# Altium PCB 1RGB-LED-Board_CR12xx-TESTBOARD.PcbDoc
Units mm, origin at the board's own origin, x right, y up, seen from the top; angles counter-clockwise.
Board outline 32.2 x 44.1 mm, 2 copper layers (Top Layer, Bottom Layer), stack 1.07 mm thick; 52 components, 36 nets, 146 pads, 144 vias.
Unrouted connection lines stored in the file: 14.
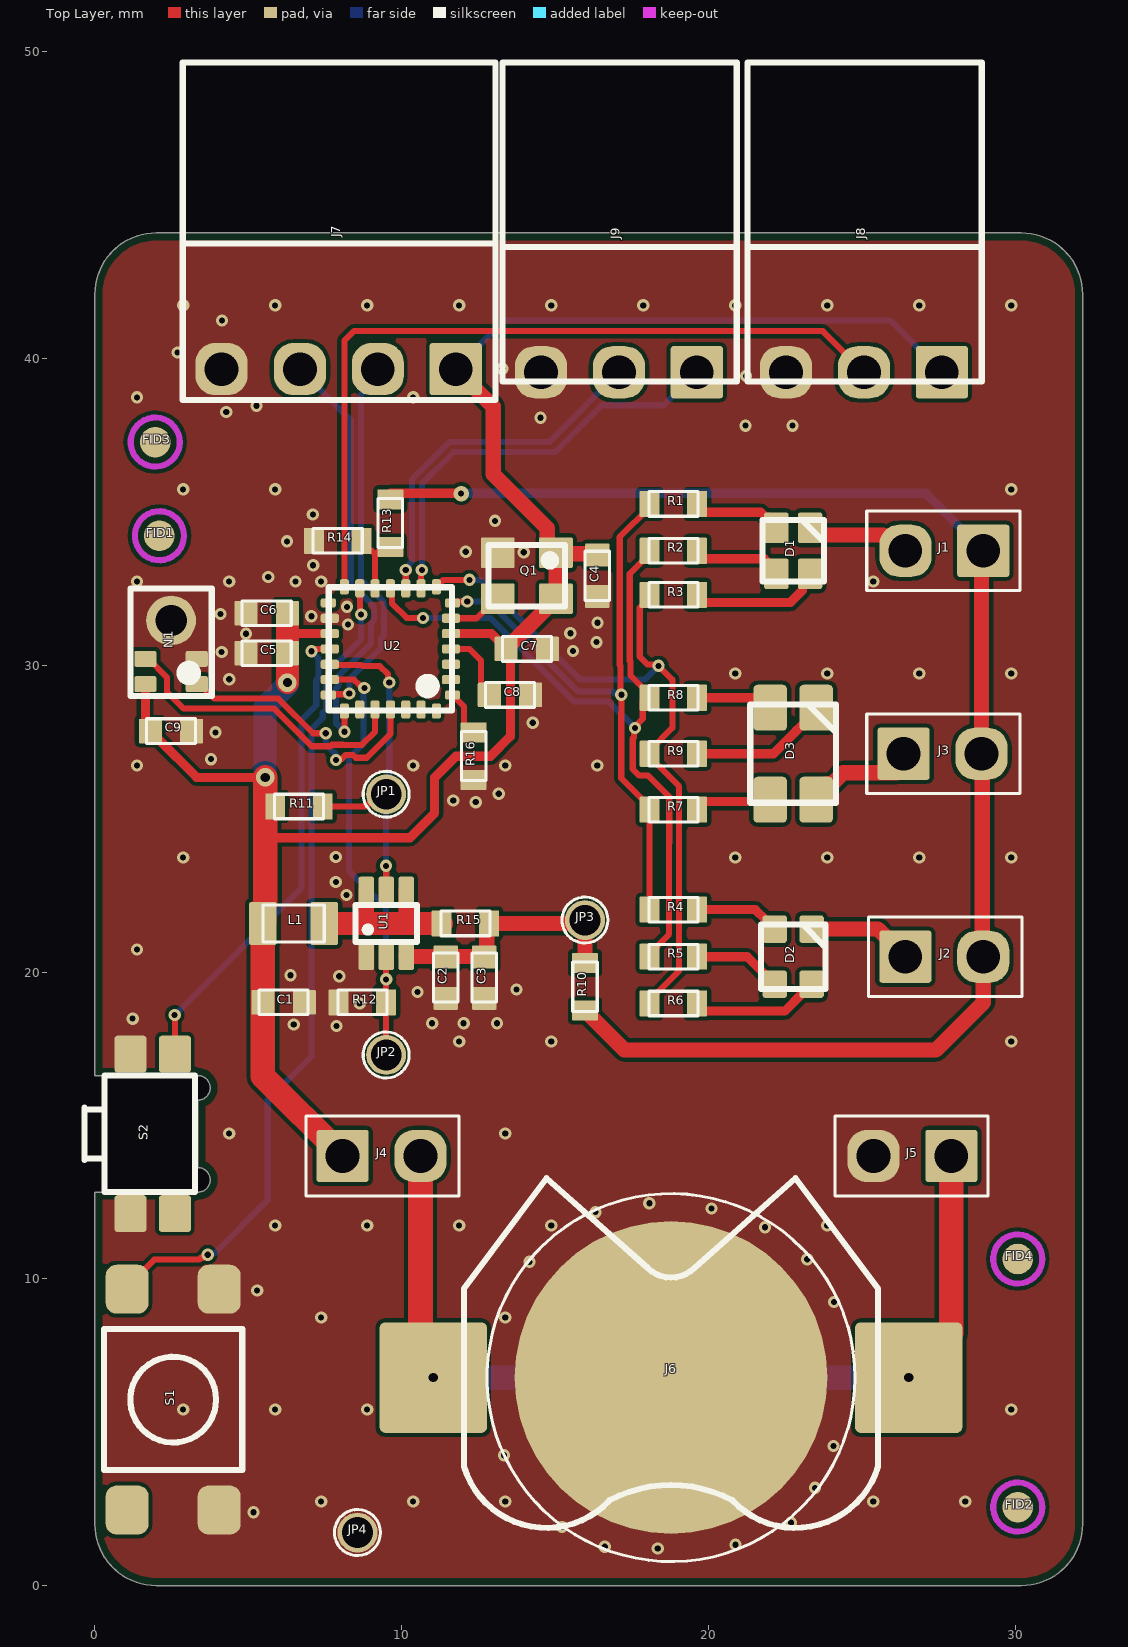
[diagram p0: Top Layer view]
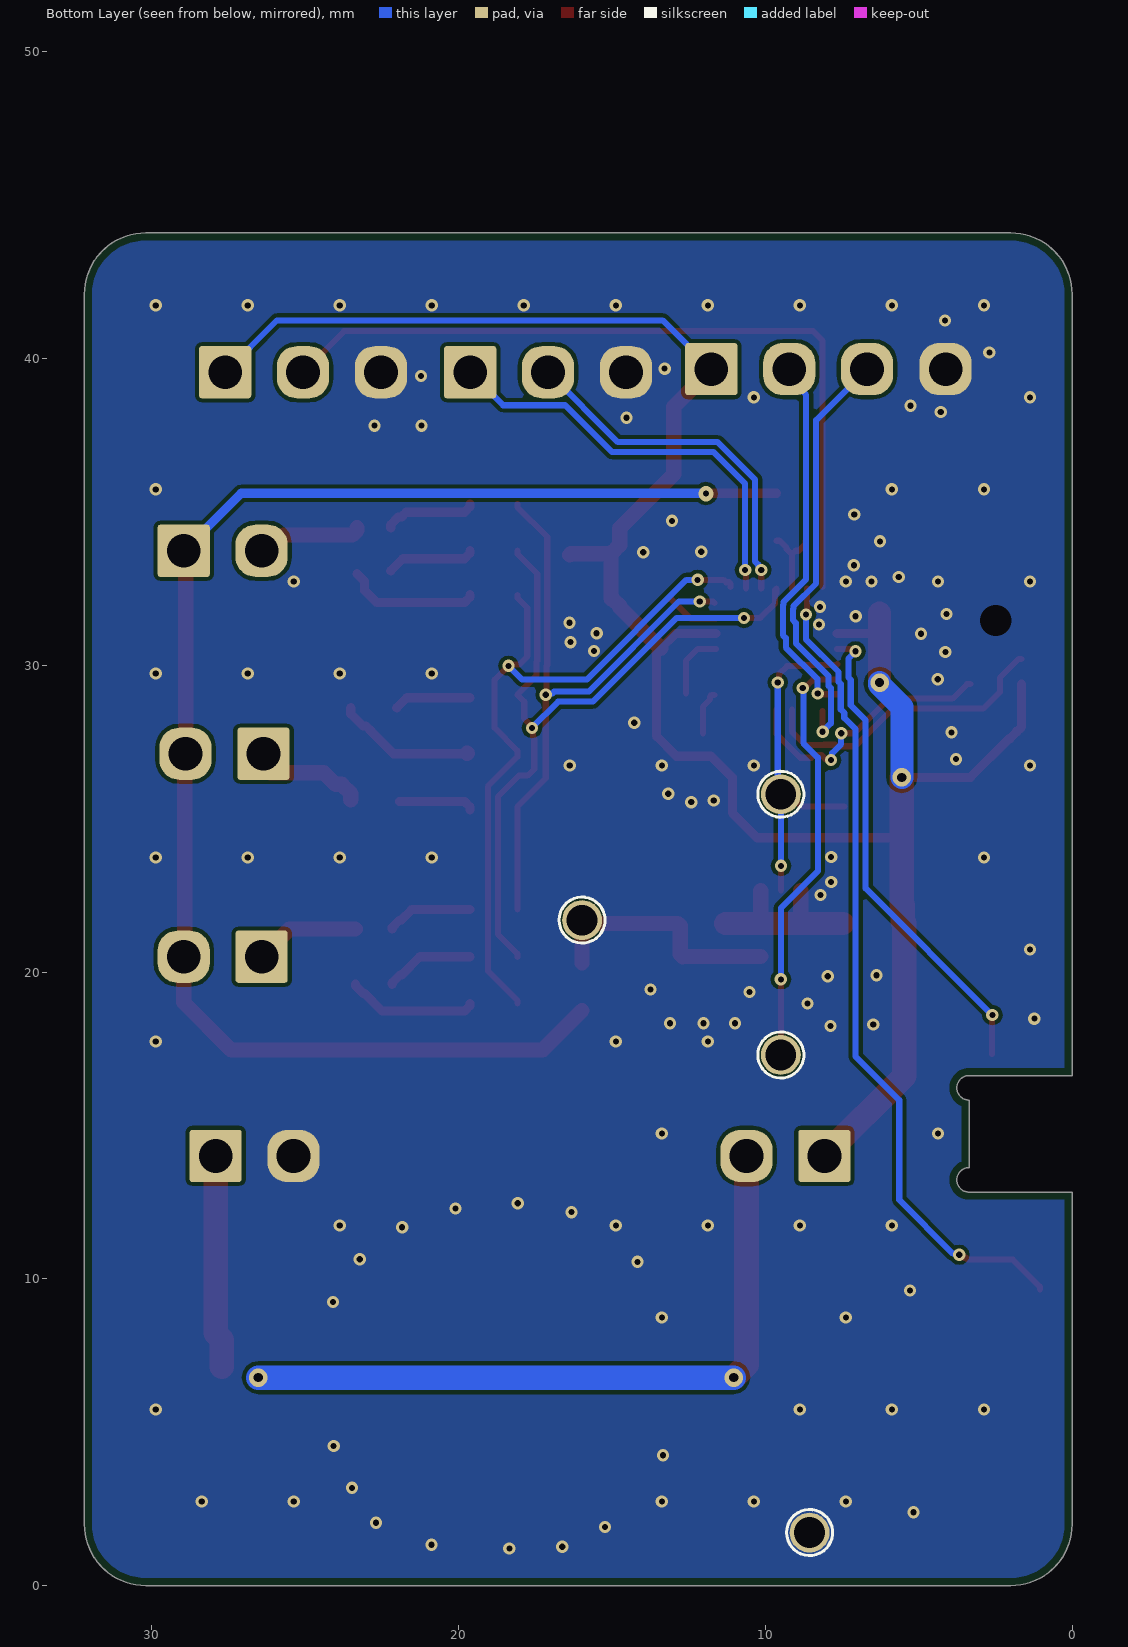
[diagram p1: Bottom Layer view, seen from below]
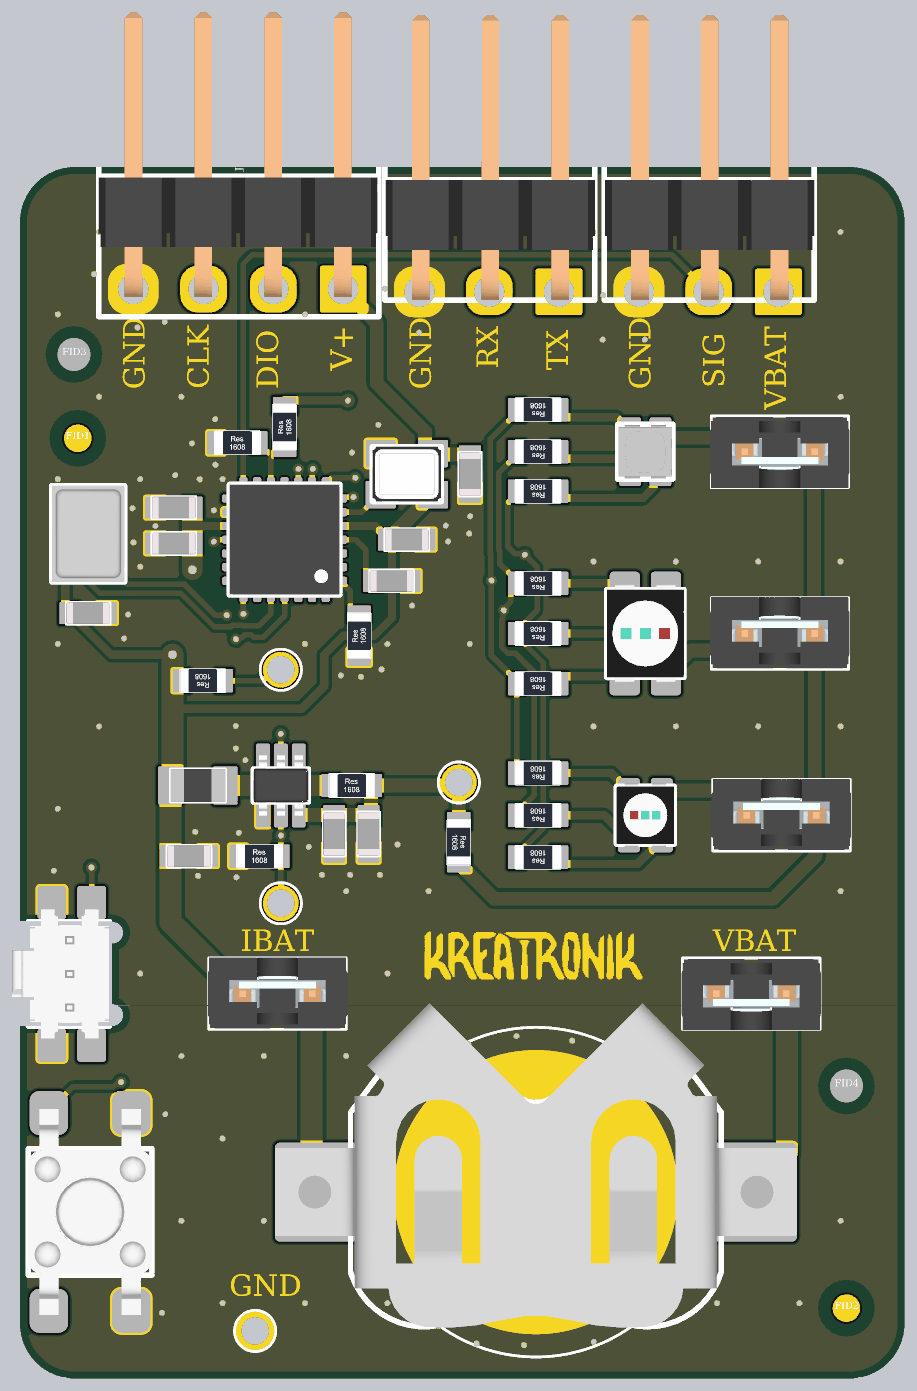
[diagram p2: 3D render of the assembled board from above, using the file's embedded part models]

## Layer stack, top to bottom
Top Solder: solder mask 0.0102, Solder Resist, Dk 3.5
Top Layer: signal copper 0.035
Dielectric1: core 1, FR-4, Dk 4.8
Bottom Layer: signal copper 0.035
Bottom Solder: solder mask 0.0102, Solder Resist, Dk 3.5

## Board outline
0,2 0,12.827 3.358,12.827 ccw(c3.358,13.227) 3.358,13.627 3.358,15.827 ccw(c3.358,16.227) 3.358,16.627 0,16.627 0,42.1 cw(c2,42.1) 2,44.1 30.2,44.1 cw(c30.2,42.1) 32.2,42.1 32.2,2 cw(c30.2,2) 30.2,0 2,0 cw(c2,2)

## Design rules (kind name [scope] priority, off if disabled: settings)
BoardOutlineClearance BoardOutlineClearance_ANT [InComponent('Y1')] p1: gap=0 ignorepadtopadclearanceinfootprint=FALSE
BoardOutlineClearance [Not(  OnLayer('Top Overlay') OR OnLayer('Bottom Overlay') OR (IsFill AND IsKeepOut) )] p2: gap=0.25 ignorepadtopadclearanceinfootprint=FALSE except(0: Arc-SplitContinuation Track-SplitContinuation SMDPad-SplitContinuation THPad-SplitContinuation Via-SplitContinuation Fill-SplitContinuation Poly-SplitContinuation Region-SplitContinuation Text-SplitContinuation)
Clearance "PCB Rand - Via" [OnLayer('Board Outline') or OnLayer('Keep-Out Layer') vs IsVia] p1: gap=0.5 ignorepadtopadclearanceinfootprint=FALSE except(0: Arc-Hole Track-Hole SMDPad-Hole THPad-Hole Via-Hole Fill-Hole Poly-Hole Region-Hole Text-Hole)
Clearance "GND-Poly zu Keepout und Rand" [InNet('GND') and InPolygon vs OnLayer('Keep-Out Layer') or OnLayer('Board Outline')] p2: gap=0.25 ignorepadtopadclearanceinfootprint=FALSE except(0: Arc-Hole Track-Hole SMDPad-Hole THPad-Hole Via-Hole Fill-Hole Poly-Hole Region-Hole Text-Hole)
Clearance "PCB Rand" [All vs OnLayer('Board Outline') or OnLayer('Keep-Out Layer')] p3: gap=0.5 ignorepadtopadclearanceinfootprint=FALSE except(0: Arc-Hole Track-Hole SMDPad-Hole THPad-Hole Via-Hole Fill-Hole Poly-Hole Region-Hole Text-Hole)
Clearance [All] p4: gap=0.125 ignorepadtopadclearanceinfootprint=FALSE
ComponentClearance BAT-Conn-Clearance [InComponent('J1')] p1: gap=-10 collisioncheckmode=3 verticalgap=2540 showdistances=TRUE
ComponentClearance [All and not (HasFootprint('CON-01-PAD-1MM-0.5MM')) vs All and not (HasFootprint('CON-01-PAD-1MM-0.5MM'))] p2: gap=0.25 collisioncheckmode=3 verticalgap=0.25 showdistances=TRUE
DiffPairsRouting [All] p1: maxlimit=0.25 minlimit=0.15 mostfreqgap=0.15 toplayer_minwidth=0.381 toplayer_maxwidth=0.381 toplayer_prefwidth=0.381 bottomlayer_minwidth=0.381 bottomlayer_maxwidth=0.381 bottomlayer_prefwidth=0.381 maxuncoupledlength=15
FabricationTestPointUsage TestPointUsage [All] p1: valid=0 allowmultiple=FALSE
FabricationTestpoint Testpoint [All] p1: side=3 testpointundercomponent=TRUE minsize=1.016 maxsize=2.54 preferedsize=1.524 minholesize=0 maxholesize=1.016 preferedholesize=0.813 testpointgrid=0.025 allowsidetop=TRUE allowsidebottom=TRUE usegrid=TRUE gridtolerance=0
HoleSize "HS: 0,3" [All] p1 off: absolutevalues=TRUE maxlimit=6 minlimit=0.3 maxpercent=80.000 minpercent=20.000
HoleSize "HS: 0,2" [All] p2: absolutevalues=TRUE maxlimit=6 minlimit=0.2 maxpercent=80.000 minpercent=20.000
HoleSize "HS: 0,1" [All] p3 off: absolutevalues=TRUE maxlimit=6 minlimit=0.1 maxpercent=80.000 minpercent=20.000
HoleToHoleClearance [All] p1: gap=0.2 allowstackedmicrovias=TRUE
MinimumAnnularRing "MAR: 100µ" [All] p1: minimumring=0.1
MinimumAnnularRing "MAR: 150µ" [All] p2: minimumring=0.15
MinimumSolderMaskSliver [All] p1: minsoldermaskwidth=0.025
PolygonConnect "Small Parts" [All vs isBGA or HasFootprint('AS1369') or HasFootprint('1005*') or InComponentClass('Thermal Connect')] p1: connectstyle=Relief reliefconductorwidth=0.25 reliefentries=4 polygonreliefangle="90 Angle" airgapwidth=0.15
PolygonConnect [All] p2: connectstyle=Direct reliefconductorwidth=0.254 reliefentries=4 polygonreliefangle="90 Angle" airgapwidth=0.254
RoomDefinition MIC [InComponentClass('MIC')] p1: confinementstyle=ConfineIn formatcopy=TRUE lockcomponents=FALSE outline 0.675,26.939 4.275,26.939 4.275,32.939 0.675,32.939
RoomDefinition MCU [InComponentClass('MCU')] p2: confinementstyle=ConfineIn formatcopy=TRUE lockcomponents=FALSE outline -0.725,1.239 29.475,1.239 29.475,50.139 -0.725,50.139
RoomDefinition main [InComponentClass('main')] p3: confinementstyle=ConfineIn formatcopy=TRUE lockcomponents=FALSE outline 0.775,-0.061 31.275,-0.061 31.275,38.439 0.775,38.439
RoomDefinition LED-BOOST [InComponentClass('LED-BOOST')] p4: confinementstyle=ConfineIn formatcopy=TRUE lockcomponents=FALSE outline 4.375,0.539 17.175,0.539 17.175,26.939 4.375,26.939
RoomDefinition LED [InComponentClass('LED')] p5: confinementstyle=ConfineIn formatcopy=TRUE lockcomponents=FALSE outline 17.275,18.039 31.301,18.039 31.301,42.439 17.275,42.439
RoutingVias [All] p1: holewidth=0.711 width=1.27 viastyle="Through Hole" minholewidth=0.711 minwidth=1.27 maxholewidth=0.711 maxwidth=1.27 useviatemplates=TRUE viatemplateguid#1={93CA593B-2D62-4187-8CEF-BA4018FDB265} viatemplateguid#2={C020742E-4225-4D37-AA3F-1E6F10C9B13B} viatemplateguid#3={AAC86185-F004-4DD8-89E3-795B75924E0A} viatemplateguid#4={FE4B4347-794B-491A-909B-5C65A400149C} viatemplatename#1=v40h20m0mx0 viatemplatename#2=v50h20m0mx0 viatemplatename#3=v60h30m0mx0 viatemplatename#4=v100h50m0mx0
SilkToSilkClearance [All] p1: silktosilkclearance=0
SilkToSolderMaskClearance SilkscreenOverComponentPads [IsPad] p1: minsilkscreentomaskgap=0 clearancetoexposedcopper=TRUE
SolderMaskExpansion "GND Pads" [IsPad and InNet('GND') and Not ((Name Like '*-TP') Or HasFootprint('AS1369'))] p1: expansion=0 istentingtop=FALSE
SolderMaskExpansion [All] p2: expansion=0.075 istentingtop=FALSE
UnRoutedNet UnRoutedNet_BatteryHolder [(Footprint = 'BAT-CR1225-SMD-HARWIN')] p1:
UnRoutedNet UnRoutedNet_1 [All] p2:
Width [All] p1: maxlimit=2 minlimit=0.125 preferedwidth=0.2 checkconnectedcopper=TRUE
20 further rules are at their usual default settings.

## Classes and differential pairs
component class MIC: C9 N1
component class MCU: C4 C5 C6 C7 C8 J7 J8 J9 Q1 R13 R14 R16 S1 S2 U2
component class main: FID1 FID2 FID3 FID4 J4 J5 J6
component class LED: D1 D2 D3 J1 J2 J3 R1 R2 R3 R4 R5 R6 R7 R8 R9
component class LED-BOOST: C1 C2 C3 JP1 JP2 JP3 JP4 L1 R10 R11 R12 R15 U1

## Components (designator, comment, footprint, x,y, rotation, side; value= is the part's Value field where it differs from the comment)
C1 "CAP-NP" 1608C 6.152,19.015 r180 top value="4.7 µF"
C2 "CAP-NP" 1608C 11.437,19.821 r90 top value="4.7 µF"
C3 "CAP-NP" 1608C 12.692,19.821 r90 top value="100 nF"
C4 "CAP-NP" 1608C 16.381,32.922 r90 top value="100 nF"
C5 "CAP-NP" 1608C 5.6,30.4 r0 top value="4.7 µF"
C6 "CAP-NP" 1608C 5.6,31.7 r0 top value="100 nF"
C7 "CAP-NP" 1608C 14.081,30.536 r180 top value="100 nF"
C8 "CAP-NP" 1608C 13.531,29.036 r180 top value="100 nF"
C9 "CAP-NP" 1608C 2.479,27.859 r180 top value="100 nF"
D1 "DIO-LED-RGB-CA-PIN1-CLMVx-FKA" LED-RGB-PLCC4-2020-CLMVx-FKA 22.765,33.736 r270 top
D2 "DIO-LED-RGB-CA-PIN1" LED-RGB-2121-ASMB-LTB 22.765,20.503 r270 top
D3 "DIO-LED-RGB-CA-PIN2-ASMB-BTE1" LED-RGB-3228-ASMB-BTE 22.765,27.12 r270 top
FID1 "FIDUCIAL" FID-1MM-0.5MM 2.102,34.227 r90 top
FID2 "FIDUCIAL" FID-1MM-0.5MM 30.086,2.557 r90 top
FID3 "FIDUCIAL-CIRCLE-PASTE" FID-1MM-0.5MM-PASTE 1.965,37.278 r90 top
FID4 "FIDUCIAL-CIRCLE-PASTE" FID-1MM-0.5MM-PASTE 30.086,10.648 r90 top
J1 "CON-02" CON-02-1-254-V-T-PFL-Jumper 27.692,33.736 r180 top
J2 "CON-02" CON-02-1-254-V-T-PFL-Jumper 27.692,20.503 r0 top
J3 "CON-02" CON-02-1-254-V-T-PFL-Jumper 27.632,27.12 r0 top
J4 "CON-02" CON-02-1-254-V-T-PFL-Jumper 9.345,14.007 r0 top
J5 "CON-02" CON-02-1-254-V-T-PFL-Jumper 26.652,14.007 r180 top
J6 "BAT-COIN" BAT-CR1225-SMD-HARWIN 18.782,6.781 r0 top
J7 "CON-04" CON-04-1-254-H-T-PFL 7.943,39.658 r180 top
J8 "CON-03" CON-03-1-254-H-T-PFL 25.071,39.558 r180 top
J9 "CON-03" CON-03-1-254-H-T-PFL 17.083,39.558 r180 top
JP1 "CON-01-TESTPOINT" CON-01-PAD-1.3MM-1MM 9.494,25.799 r180 top
JP2 "CON-01-TESTPOINT" CON-01-PAD-1.3MM-1MM 9.494,17.299 r270 top
JP3 "CON-01-TESTPOINT" CON-01-PAD-1.3MM-1MM 15.977,21.696 r90 top
JP4 "CON-01-TESTPOINT" CON-01-PAD-1.3MM-1MM 8.56,1.728 r90 top
L1 "INDUCTOR" 2012L 6.477,21.586 r0 top value="4.7 uH"
N1 "SNS-MIC-T3902" SNS-MIC-T3902 2.483,30.753 r180 top
Q1 "CRYS-OSC" CRYS-OSC-2.5x2.0 14.081,32.922 r270 top value="12 MHz"
R1 "RES" 1608R 18.859,35.263 r180 top value=150
R2 "RES" 1608R 18.859,33.736 r180 top value=27
R3 "RES" 1608R 18.859,32.3 r180 top value=27
R4 "RES" 1608R 18.859,22.037 r180 top value=150
R5 "RES" 1608R 18.859,20.503 r180 top value=27
R6 "RES" 1608R 18.859,18.977 r180 top value=27
R7 "RES" 1608R 18.859,25.295 r180 top value=150
R8 "RES" 1608R 18.859,28.945 r180 top value=27
R9 "RES" 1608R 18.859,27.12 r180 top value=27
R10 "RES" 1608R 15.977,19.523 r270 top value=0
R11 "RES" 1608R 6.653,25.399 r180 top value=100k
R12 "RES" 1608R 8.719,19.015 r0 top value=100k
R13 "RES" 1608R 9.633,34.637 r90 top value=200K
R14 "RES" 1608R 7.916,34.061 r0 top value=100k
R15 "RES" 1608R 12.079,21.586 r0 top value=0
R16 "RES" 1608R 12.345,27.041 r90 top value=10k
S1 "SWI-PU" SWI-PU-TL3305BF 2.551,6.062 r0 top
S2 "SWI-PU" SWI-PU-RA-EVQP7(A+J)01P-REVERSEMOUNT 1.783,14.727 r270 top
U1 "TRANS-FET-DUAL-N-P-6PIN" TRANS-DUAL-SOT-363-6 9.498,21.586 r90 top
U2 "IC-STM32L011GxUx-QFN28" IC-ST-UFQFN28 9.633,30.536 r180 top

## Footprints (in the part's own frame and the unit in brackets; to place one, negate y for a bottom-side part, rotate by r counter-clockwise, add the part's x,y. Pads: shape width x height; smd on the part's side, far side on the other; paste and mask are expansions set on the pad)
1608C [mm] "Chip Capacitor, 2-Leads, Body 1,6x0,8mm, IPC High Density"
  rrect10% 0.75x0.8 smd: 1(-0.675,0) 2(0.675,0)
  silkscreen extent -0.8,-0.4 0.8,0.4, body extent -0.8,-0.4 0.8,0.4, height 0.79
1608R [mm] "Chip Resistor, 2-Leads, Body 1,6x0,8mm, IPC High Density"
  rrect10% 0.65x0.85 smd: 1(-0.775,0) 2(0.775,0)
  silkscreen extent -0.8,-0.4 0.8,0.4, body extent -0.82,-0.42 0.82,0.42, height 0.45
2012L [mm] "2012 Footprint mit 3D Model für Inductor"
  rrect15% 0.9x1.4 smd: 1(-1,0) 2(1,0)
  silkscreen extent -1,-0.6 1,0.6, body extent -1,-0.6 1,0.6, height 0.9
BAT-CR1225-SMD-HARWIN [mm]
  rrect10% 3.5x3.6 smd: 1(-7.75,0) 1(7.75,0)
  round 10.2 smd paste-6: 2(0,0)
  silkscreen extent -6.75,-6 6.75,6.5, body extent -9.5,-4.94 9.5,6.88, height 3.21
CON-01-PAD-1.3MM-1MM [mm]
  round 1.3 hole 1: 1(0,0)
  silkscreen extent -0.75,-0.75 0.75,0.75, body extent -0.65,-0.65 0.65,0.65, height 0.01
CON-02-1-254-V-T-PFL-Jumper [mm] "Stiftleiste 2.54mm stehend"
  rrect10% 1.7x1.7 hole 1.1: 1(-1.27,0)
  rrect75% 1.7x1.7 hole 1.1: 2(1.27,0)
  silkscreen extent -2.47,-1.3 2.53,1.3, body extent -2.51,-1.27 2.57,1.32, height 8.69
CON-03-1-254-H-T-PFL [mm]
  rrect10% 1.7x1.7 hole 1.1: 1(-2.54,0)
  rrect75% 1.7x1.7 hole 1.1: 2(0,0) 3(2.54,0)
  silkscreen extent -3.84,-10.1 3.8,0.3, body extent -3.85,-10.07 3.77,0.29, height 2.67
CON-04-1-254-H-T-PFL [mm]
  rrect10% 1.7x1.7 hole 1.1: 1(-3.82,0)
  rrect75% 1.7x1.7 hole 1.1: 2(-1.28,0) 3(1.26,0) 4(3.82,0)
  silkscreen extent -5.12,-10 5.08,1, body extent -5.08,-10.07 5.08,0.29, height 2.55
CRYS-OSC-2.5x2.0 [mm] "Standard Crystal Oscillator"
  rrect10% 1x1.1 smd: 1(-0.75,0.95) 2(-0.75,-0.95) 3(0.75,-0.95) 4(0.75,0.95)
  silkscreen extent -1,-1.25 1,1.25, body extent -1,-1.25 1,1.25, height 0.76
FID-1MM-0.5MM [mm] "1mm fiducial with 0.5mm clearance"
  round 1 smd paste-1: NC(0,0)
  Top Layer keep-out circle w0.2: c0,0 r0.8
FID-1MM-0.5MM-PASTE [mm] "1mm fiducial with 0.5mm clearance"
  round 1 smd paste+0.1: NC(0,0)
  Top Layer keep-out circle w0.2: c0,0 r0.8
IC-ST-UFQFN28 [mm]
  rrect50% 0.5x0.3 smd: 1(-2.025,1.5) 7(-2.025,-1.5) 15(2.025,-1.5) 21(2.025,1.5)
  rrect50% 0.6x0.3 smd: 2(-1.975,1) 3(-1.975,0.5) 4(-1.975,0) 5(-1.975,-0.5) 6(-1.975,-1) 16(1.975,-1) 17(1.975,-0.5) 18(1.975,0) 19(1.975,0.5) 20(1.975,1)
  rrect50% 0.3x0.5 smd: 8(-1.5,-2.025) 14(1.5,-2.025) 22(1.5,2.025) 28(-1.5,2.025)
  rrect50% 0.3x0.6 smd: 9(-1,-1.975) 10(-0.5,-1.975) 11(0,-1.975) 12(0.5,-1.975) 13(1,-1.975) 23(1,1.975) 24(0.5,1.975) 25(0,1.975) 26(-0.5,1.975) 27(-1,1.975)
  silkscreen extent -2.01,-2.01 2.01,2.01, body extent -2.01,-2.01 2.01,2.01, height 0.6
LED-RGB-2121-ASMB-LTB [mm]
  rrect25% 0.9x0.8 smd: 1(-0.9,0.6) 2(-0.9,-0.6) 3(0.9,-0.6) 4(0.9,0.6)
  silkscreen extent -1.05,-1.05 1.05,1.05, body extent -1.15,-1.05 1.15,1.05, height 1
LED-RGB-3228-ASMB-BTE [mm]
  rrect25% 1.5x1.1 smd: 1(-1.5,0.75) 2(1.5,0.75) 3(1.5,-0.75) 4(-1.5,-0.75)
  silkscreen extent -1.6,-1.4 1.6,1.4, body extent -1.8,-1.4 1.8,1.4, height 1.9
LED-RGB-PLCC4-2020-CLMVx-FKA [mm]
  rrect20% 1x0.8 smd: 1(-0.75,0.55) 2(0.75,0.55) 3(0.75,-0.55) 4(-0.75,-0.55)
  silkscreen extent -1,-1 1,1, body extent -0.98,-0.97 0.97,0.97, height 0.91
SNS-MIC-T3902 [mm] "MEMS Microphone with PDM Interface"
  rrect25% 0.725x0.522 smd: 1(-0.837,1.364) 5(0.838,1.364)
  rrect25% 0.725x0.52 smd: 2(-0.837,0.542) 4(0.838,0.542)
  round 1.625 / inner round 1.625 / far side round 0 hole 1.025 unplated paste+3: 3(0,-0.71)
  silkscreen extent -1.33,-1.75 1.33,1.75, body extent -1.33,-1.75 1.32,1.75, height 0.99
SWI-PU-RA-EVQP7(A+J)01P-REVERSEMOUNT [mm]
  rrect20% 1.2x1.05 smd: 1(-2.6,0.825) 1(2.6,0.825) 2(-2.6,-0.625) 2(2.6,-0.625)
  silkscreen extent -1.9,-2.13 1.9,1.47, body extent -2.35,-2.08 2.35,1.48, height 0.16
SWI-PU-TL3305BF [mm]
  rrect50% 1.4x1.6 smd: 1(-1.5,-3.6) 1(-1.5,3.6) 2(1.5,-3.6) 2(1.5,3.6)
  silkscreen extent -2.25,-2.3 2.25,2.3, body extent -2.25,-3.75 2.25,3.75, height 5.01
TRANS-DUAL-SOT-363-6 [mm]
  rrect25% 0.9x0.5 smd: 1(-1.075,0.65) 2(-1.075,0) 3(-1.075,-0.65) 4(1.075,-0.65) 5(1.075,0) 6(1.075,0.65)
  silkscreen extent -0.6,-1 0.6,1, body extent -1.1,-1 1.1,1, height 1

## Part data
C1 C2 C5: library part CAP-4u7-10V-10%-X5R-1608, "SMD ceramic capacitor, X5R", CapacitanceSI=4,7E-6, hasAltManufacturer=0, Manufacturer=Samsung, Manufacturer P/N=CL10A475KP8NNNC, PackageCNTX=1608, Supplier Part Number 1=1276-1044-1-ND, Tolerance=10%, Voltage=10, A I=255, autIdem=255, ComponentLink1Description="Manufacturer Datasheet", ComponentLink1URL=http://www.samsungsem.com/kr/support/product-search/mlcc/__icsFiles/afieldfile/2019/05/10/19-CL10A475KP8NNNC.pdf, Contronix P/N=CKAU8N, Design Item Id=CAP-4u7-10V-10%-X5R-1608, FeederPitch=4mm, FeederType="Tape 8mm", Manufacturer Part Number=CL10A475KP8NNNC, Material=X5R, Modified="26.06.2020 15:47:54", MountingType=SMT, NozzleType=711/911, NumberOfPins=2, NumberOfRows=1, Obsolete=0, PackageManufacturer=1608, polarized=0, Price=0,13, Price (€)=0,13, Stock=455, Supplier 1=Digi-Key, Voltage (V)=10
C3 C4 C6 C7 C8 C9: library part CAP-100n-16V-10%-X7R-1608, "SMD ceramic capacitor", CapacitanceSI=1E-7, hasAltManufacturer=0, Manufacturer=Samsung, Manufacturer P/N=CL10B104KO8NNNC, PackageCNTX=1608, Supplier Part Number 1=1276-1005-1-ND, Tolerance=10%, Voltage=16, A I=255, autIdem=255, Contronix P/N=C41RLV, Design Item Id=CAP-100n-16V-10%-X7R-1608, FeederPitch=4mm, FeederType="Tape 8mm", Manufacturer Part Number=CL10B104KO8NNNC, Modified="07.07.2020 16:43:22", MountingType=SMT, NozzleType=701/901, NumberOfPins=2, NumberOfRows=1, Obsolete=0, PackageManufacturer=1608, polarized=0, Price=0,09, Price (€)=0,09, Stock=700, Supplier 1=Digi-Key, Voltage (V)=16
D1: library part LED-RGB-CLMVC-FKA-PLCC4, "RGB LED PLCC-4 2x2mm Common Anode", Color=RGB, hasAltManufacturer=0, Manufacturer="Cree Inc", Manufacturer P/N=CLMVC-FKA-CL1D1L71BB7C3C3, Supplier Part Number 1=CLMVC-FKA-CL1D1L71BB7C3C3CT-ND, ComponentLink1Description="Manufacturer Datasheet", ComponentLink1URL=https://www.cree.com/led-components/media/documents/1273-CLMVC-FKA.pdf, Contronix P/N=DR7TDL, Created="21.03.2018 20:33:27", Design Item Id=LED-RGB-CLMVC-FKA-PLCC4, FeederPitch=4mm, FeederType="Tape 8mm", isMulticolor=0, Manufacturer Part Number=CLMVC-FKA-CL1D1L71BB7C3C3, Modified="30.06.2020 13:58:57", MountingType=SMT, NozzleType=711/911, NumberOfPins=4, NumberOfRows=2, Obsolete=0, Price=0,17, Price (€)=0,17, Stock=15, Supplier 1=Digi-Key, Supplier 2=Mouser, Supplier Part Number 2=941-CLMVCFKACL1D1L71
D2: library part LED-RGB-2121-ASMB-LTB, "RGB LED Red 621/Green 522/Blue 468, 2.1x2.1mm PLCC-4", Color=Red/Green/Blue, hasAltManufacturer=0, isMulticolor=1, Manufacturer="Broadcom Limited", Manufacturer P/N=ASMB-LTC2-0A335, PackageCNTX=2121, A I=0, autIdem=0, ComponentLink1Description="Manufacturer Datasheet", ComponentLink1URL=https://docs.broadcom.com/doc/ASMB-LTB2-0A333-DS, Created="24.11.2020 08:49:26", Design Item Id=LED-RGB-2121-ASMB-LTC, Manufacturer Part Number=ASMB-LTC2-0A335, Modified="24.11.2020 11:03:06", MountingType=SMT, NumberOfPins=4, NumberOfRows=2, Obsolete=0, PackageManufacturer=2121, Price=0,42, Price (€)=0,42, Remark="Alternative (andere Farbbelegung!): Dialight 598-8710-307F (Digi-Key: 350-2096-1-ND)", ViewingAngle=110
D3: library part LED-RGB-3228-ASMB-BTE, "RGB LED Red 622/Green 529/Blue 469, 3.2x2.8mm PLCC-4", Color=Red/Green/Blue, hasAltManufacturer=0, isMulticolor=1, Manufacturer="Broadcom Limited", Manufacturer P/N=ASMB-BTE1-0B332, PackageCNTX=3228, Supplier Part Number 1=516-3964-1-ND, A I=0, autIdem=0, ComponentLink1Description="Manufacturer Datasheet", ComponentLink1URL=https://docs.broadcom.com/doc/AV02-4236EN, Contronix P/N=DXD6S6, Created="24.11.2020 17:01:03", Design Item Id=LED-RGB-3228-ASMB-BTE, Manufacturer Part Number=ASMB-BTE1-0B332, Modified="24.11.2020 17:01:03", MountingType=SMT, NumberOfPins=4, NumberOfRows=2, Obsolete=0, PackageManufacturer=3228, Price=0,42, Price (€)=0,42, Remark="Alternative (andere Farbbelegung!): Dialight 598-8710-307F (Digi-Key: 350-2096-1-ND)", Supplier 1=Digi-Key, Supplier 2=Mouser, Supplier 3=Farnell, Supplier Part Number 2=630-ASMB-BTE1-0B332, Supplier Part Number 3=2401107
FID1 FID2: library part FID-1MM-0.5MM, "Fiducial Mark, 1mm diameter, 0.5mm clearance", hasAltManufacturer=0, Contronix P/N=W2HGX5, Created="28.03.2011 09:53:08", Design Item Id=FID-1MM-0.5MM, Modified="14.03.2013 14:16:18", Obsolete=0
FID3 FID4: library part FID-1MM-0.5MM-CIRCLE-PASTE, "Fiducial Mark, 1mm circle0.5mm clearance, Pastemask open", hasAltManufacturer=0, Contronix P/N=M7DEYG, Created="27.10.2017 07:53:13", Design Item Id=FID-1MM-0.5MM-CIRCLE-PASTE, Modified="27.10.2017 07:53:13", Obsolete=0
J1 J2 J3 J4 J5: library part CON-02-1-254-V-T-PFL-Jumper, "Stiftleiste, 2-polig, 2.54mm, +Jumper", hasAltManufacturer=0, Manufacturer="Würth Elektronik", Manufacturer P/N=61300211121, Supplier Part Number 1=732-5315-ND, A I=0, autIdem=0, ComponentLink1Description="Manufacturer Datasheet", ComponentLink1URL=http://www.molex.com/datasheets/pdf/0879140216_PCB_HEADERS.pdf, Contronix P/N=JT919C, Design Item Id=CON-02-1-254-V-T-PFL-Jumper, Manufacturer Part Number=61300211121, Modified="25.07.2019 11:36:41", MountingType=THT, NumberOfPins=2, NumberOfRows=1, Obsolete=0, Pitch=2,54, Price=0,05, Price (€)=0,05, Rev="Not in version control", Supplier 1=Digi-Key, Supplier 2=Mouser, Supplier Part Number 2=710-61300211121
  J1 J2 J3: Stock=43
  J4 J5: Stock=0
J6: library part BAT-CR1225-SMD-HARWIN, "CR1216 1225 Battery Holder SMT", hasAltManufacturer=0, Manufacturer=Harwin, Manufacturer P/N=S8201-46R, Supplier Part Number 1=952-1662-1-ND, ComponentLink1Description="Manufacturer Drawing", ComponentLink1URL=https://cdn.harwin.com/pdfs/S8201R.pdf, Contronix P/N=JWVM9H, Created="21.09.2020 18:54:32", Design Item Id=BAT-CR1225-SMD-HARWIN, Manufacturer Part Number=S8201-46R, Modified="21.09.2020 18:54:32", MountingType=SMT, NumberOfPins=2, NumberOfRows=1, Obsolete=0, Price=0,57, Price (€)=0,57, Rev="Not in version control", Supplier 1=Digi-Key, Supplier 2=Mouser, Supplier Part Number 2=855-S8201-46R, Type="Battery Holder"
J7: library part CON-04-1-254-H-T-PFL, "2.54 mm THT Stiftleiste einreihig abgewinkelt", Current=3, hasAltManufacturer=0, Manufacturer="Würth Elektronik", Manufacturer P/N=61300411021, Supplier Part Number 1=710-61300411021, Voltage=250, A I=0, autIdem=0, ComponentLink1Description="Manufacturer Datasheet", ComponentLink1URL=http://katalog.we-online.de/em/datasheet/6130xx11021.pdf, Contronix P/N=J47NPE, Created="26.04.2013 16:53:18", Design Item Id=CON-04-1-254-H-T-PFL, Manufacturer Part Number=61300411021, Modified="08.07.2020 13:51:49", MountingType=THT, NumberOfPins=4, NumberOfRows=1, Obsolete=0, Pitch=2,54, Price=0,33, Price (€)=0,33, Supplier 1=Mouser, Supplier 2=Digi-Key, Supplier Part Number 2=732-5337-ND
J8 J9: library part CON-03-1-254-H-T-PFL, "2.54 mm THT Stiftleiste einreihig abgewinkelt WR-PHD", Current=3, hasAltManufacturer=0, Manufacturer="Würth Elektronik", Manufacturer P/N=61300311021, Supplier Part Number 1=710-61300311021, Voltage=250, A I=255, autIdem=255, Contronix P/N=J7DBHL, Created="26.02.2014 16:48:15", Design Item Id=CON-03-1-254-H-T-PFL, Manufacturer Part Number=61300311021, Modified="19.11.2020 16:50:59", MountingType=THT, NumberOfPins=3, NumberOfRows=1, Obsolete=0, Pitch=2,54, Price=0,22, Price (€)=0,22, Stock=10, Supplier 1=Mouser, Supplier 2=Digi-Key, Supplier Part Number 2=732-5336-ND
JP1 JP2 JP3 JP4: library part CON-01-TESTPOINT-1.3MM-1MM, "1.3 mm rund mit 1.0 mm Bohrung", hasAltManufacturer=0, A I=0, autIdem=0, Contronix P/N=JMZ13D, Created="04.06.2015 12:33:39", Design Item Id=CON-01-TESTPOINT-1.3MM-1MM, Modified="04.06.2015 12:33:39", MountingType=THT, NumberOfPins=1, NumberOfRows=1, Obsolete=0, Price=0, Price (€)=0
L1: library part IND-4u7-0.8A-2012, "Chip Inductor", Current=0,8, hasAltManufacturer=0, Inductance="4.7 uH", InductanceSI=4,7E-6, Manufacturer="Murata Electronics", Manufacturer P/N=LQM21PN4R7NGRD, PackageCNTX=2012, Resistance=0.288, Supplier Part Number 1=490-7782-1-ND, Tolerance=30%, ComponentLink1Description="Manufacturer Datasheet", ComponentLink1URL=http://search.murata.co.jp/Ceramy/image/img/P02/JELF243B-0026.pdf, Contronix P/N=LD7UG2, Created="09.11.2017 14:17:36", Design Item Id=IND-4u7-0.8A-2012, FeederPitch=4mm, FeederType="Tape 8mm", Manufacturer Part Number=LQM21PN4R7NGRD, Modified="14.11.2018 11:06:53", MountingType=SMT, NozzleType=711/911, NumberOfPins=2, NumberOfRows=1, Obsolete=0, PackageManufacturer=2012, Price=0,106, Price (€)=0,106, Stock=18, Supplier 1=Digi-Key, Supplier 2=Mouser, Supplier Part Number 2=81-LQM21PN4R7NGRDRD
N1: library part N36NTX, "Bottom Port PDM Low‐Power Multi‐Mode Microphone With High AOP Mode", hasAltManufacturer=0, Manufacturer=InvenSense, Manufacturer P/N=MMICT390200012, Supplier Part Number 1=1428-MMICT390200012CT-ND, VoltageMax=3,6, VoltageMin=1,65, ComponentLink1Description="Manufacturer Datasheet", ComponentLink1URL=http://invensense.tdk.com/wp-content/uploads/2020/05/DS-000357-T3902-v1.0.pdf, Contronix P/N=N36NTX, Created="08.10.2020 15:24:47", Design Item Id=SNS-MIC-T3902, Manufacturer Part Number=MMICT390200012, Modified="08.10.2020 16:48:36", MountingType=SMT, NumberOfPins=5, NumberOfRows=2, Obsolete=0, PhysicalProperty=Sound, Price=0,85, Price (€)=0,85, Rev="Not in version control", Supplier 1=Digi-Key
Q1: library part CRYS-OSC-12MHz-SL-2.5x2-50ppm, "Crystal Oscillator", Frequency="12 MHz", hasAltManufacturer=0, Manufacturer="Silicon Laboratories Inc.", Manufacturer P/N=501HCA12M0000DAF, Supplier Part Number 1=336-2890-ND, Tolerance="50 ppm", ComponentLink1Description="Manufacturer Datasheet", ComponentLink1URL=http://www.silabs.com/Support%20Documents/TechnicalDocs/Si501-2-3.pdf, Contronix P/N=QKVPV6, Created="09.12.2015 13:31:20", Design Item Id=CRYS-OSC-12MHz-SL-2.5x2-50ppm, Manufacturer Part Number=501HCA12M0000DAF, Modified="31.07.2018 12:04:49", NumberOfPins=4, NumberOfRows=2, Obsolete=0, Rev="Not in version control", Supplier 1=Digi-Key, Supplier 2=Mouser, Supplier Part Number 2=634-501HCA12M0000DAF
R1 R4 R7: library part RES-150R-1%-0.125W-1608, "SMD resistor", hasAltManufacturer=0, Manufacturer="KOA Speer Electronics, Inc.", Manufacturer P/N=RK73H1JTTD1500F, PackageCNTX=1608, Power=0,125, Resistance=150, Supplier Part Number 1=2019-RK73H1JTTD1500FCT-ND, Tolerance=1%, A I=255, autIdem=255, Contronix P/N=R7WPV7, Created="17.09.2020 14:11:09", Design Item Id=RES-150R-1%-0.125W-1608, FeederPitch=4mm, FeederType="Tape 8mm", Manufacturer Part Number=RK73H1JTTD1500F, Modified="17.09.2020 14:14:26", MountingType=SMT, NozzleType=711/911, NumberOfPins=2, NumberOfRows=1, Obsolete=0, PackageManufacturer=1608, Price=0,08, Price (€)=0,08, ResistanceSI=150, Stock=17, Supplier 1=Digi-Key, Supplier 2=Mouser, Supplier Part Number 2=660-RK73H1JTTD1500F
R2 R3 R5 R6 R8 R9: library part RES-27R-1%-0.1W-1608, "SMD resistor", hasAltManufacturer=0, Manufacturer="Stackpole Electronics Inc", Manufacturer P/N=RMCF0603FT27R0, PackageCNTX=1608, Power=0,1, Resistance=27, Supplier Part Number 1=RMCF0603FT27R0CT-ND, Tolerance=1%, A I=255, autIdem=255, ComponentLink1Description="Manufacturer Datasheet", ComponentLink1URL=http://www.seielect.com/Catalog/SEI-RMCF_RMCP.pdf, Contronix P/N=RAE6H8, Created="23.08.2012 12:04:38", Design Item Id=RES-27R-1%-0.1W-1608, FeederPitch=4mm, FeederType="Tape 8mm", Manufacturer Part Number=RMCF0603FT27R0, Modified="23.10.2019 11:35:16", MountingType=SMT, NozzleType=711/911, NumberOfPins=2, NumberOfRows=1, Obsolete=0, PackageManufacturer=1608, Price=0,003, Price (€)=0,003, ResistanceSI=27, Stock=3984, Supplier 1=Digi-Key
R10 R15: library part RES-0R-1%-0.1W-1608, "SMD resistor", hasAltManufacturer=0, Manufacturer="Bourns Inc.", Manufacturer P/N=CR0603-J/-000ELF, PackageCNTX=1608, Power=0,1, Supplier Part Number 1=652-CR0603-J/-000ELF, A I=255, autIdem=255, Contronix P/N=RBXGUK, Design Item Id=RES-0R-1%-0.1W-1608, FeederPitch=4mm, FeederType="Tape 8mm", Manufacturer Part Number=CR0603-J/-000ELF, Modified="16.08.2019 13:28:22", MountingType=SMT, NozzleType=701/901, NumberOfPins=2, NumberOfRows=1, Obsolete=0, PackageManufacturer=1608, Price=0,00373, Price (€)=0,00373, Resistance=0, ResistanceSI=0, Stock=6271, Supplier 1=Mouser, Supplier 2=Digi-Key, Supplier Part Number 2=CR0603-J/-000ELFCT-ND
R11 R12 R14 R16: library part RES-100k-1%-0.1W-1608, "SMD resistor", hasAltManufacturer=0, Manufacturer="Panasonic - ECG", Manufacturer P/N=ERJ-2RKF1003X, PackageCNTX=1608, Power=0,1, Resistance=100k, ResistanceSI=100000, Supplier Part Number 1=P100KLCT-ND, Tolerance=1%, A I=255, autIdem=255, ComponentLink1Description="Manufacturer Datasheet", ComponentLink1URL=http://www.mouser.com/ds/2/315/AOA0000C86-911473.pdf, Contronix P/N=RBZVDE, Design Item Id=RES-100k-1%-0.1W-1608, FeederPitch=4mm, FeederType="Tape 8mm", Manufacturer Part Number=ERJ-2RKF1003X, Modified="27.07.2018 09:54:07", MountingType=SMT, NozzleType=711/911, NumberOfPins=2, NumberOfRows=1, Obsolete=0, PackageManufacturer=1608, Price=0,01, Price (€)=0,01, Stock=3994, Supplier 1=Digi-Key, Supplier 2=Mouser, Supplier Part Number 2=667-ERJ-2RKF1003X
R13: library part RES-200K-1%-0.1W-1608, "SMD resistor", hasAltManufacturer=0, Manufacturer="Bourns Inc.", Manufacturer P/N=CR0603-FX-2003ELF, PackageCNTX=1608, Power=0,1, Resistance=200K, ResistanceSI=200, Supplier Part Number 1=652-CR0603FX-2003ELF, Tolerance=1%, A I=0, autIdem=0, Contronix P/N=RU9VK8, Created="25.09.2019 09:10:32", Design Item Id=RES-200K-1%-0.1W-1608, FeederPitch=4mm, FeederType="Tape 8mm", Manufacturer Part Number=CR0603-FX-2003ELF, Modified="08.10.2019 17:16:22", MountingType=SMT, NozzleType=711/911, NumberOfPins=2, NumberOfRows=1, Obsolete=0, PackageManufacturer=1608, Price=0,1, Price (€)=0,1, Stock=990, Supplier 1=Mouser, Supplier 2=Digi-Key, Supplier Part Number 2=CR0603-FX-2003ELFCT-ND
S1: library part SWI-PU-TL3305BF160QG, "SMD Push Button", hasAltManufacturer=0, Manufacturer=E-Switch, Manufacturer P/N=TL3305BF160QG, Supplier Part Number 1=612-TL3305BF160QG, ComponentLink1Description="Manufacturer Drawing", ComponentLink1URL=http://spec_sheets.e-switch.com/specs/P010469.pdf, Contronix P/N=SMYVDF, Created="24.06.2019 10:22:36", Design Item Id=SWI-PU-TL3305BF160QG, FeederPitch=8mm, FeederType="Tape 16mm", Manufacturer Part Number=TL3305BF160QG, Modified="01.07.2020 16:19:31", MountingType=SMT, NozzleType=701/901, NumberOfPins=4, NumberOfRows=2, Obsolete=0, Price=0,28, Price (€)=0,28, Stock=0, Supplier 1=Mouser, Supplier 2=Digi-Key, Supplier Part Number 2=EG5351CT-ND, Type="Pushbutton SPST"
S2: library part SWI-PU-RA-EVQP7J01P, "SMD Push Button, Right Angle, straight terminals", hasAltManufacturer=0, Manufacturer=Panasonic, Manufacturer P/N=EVQP7J01P, Supplier Part Number 1=667-EVQP7J01P, Contronix P/N=SGUKDA, Created="28.03.2018 19:53:29", Design Item Id=SWI-PU-RA-EVQP7J01P, Manufacturer Part Number=EVQP7J01P, Modified="24.11.2020 18:20:58", MountingType=SMT, NumberOfPins=4, NumberOfRows=2, Obsolete=0, Price=0,28, Price (€)=0,28, Stock=0, Supplier 1=Mouser, Supplier 2=Digi-Key, Supplier Part Number 2=P16767CT-ND, Type="Pushbutton SPST"
U1: "N and P-Channel MOSFET", Current=4,7, hasAltManufacturer=0, Manufacturer="Diodes Inc.", Manufacturer Part Number=BSS8402DW-7-F, ComponentLink1Description="Manufacturer Datasheet", ComponentLink1URL=https://www.diodes.com/assets/Datasheets/DMC2041UFDB.pdf, Created="13.02.2018 12:07:42", Design Item Id=TRANS-FET-DUAL-N-P-20V, FeederPitch=4mm, FeederType="Tape 8mm"
U2: library part IC-STM32L011G4U6-QFN28, "Access line ultra-low-power 32-bit MCU Arm®-based Cortex®-M0+, 16KB Flash, 2KB SRAM, 512B EEPROM, ADC", hasAltManufacturer=0, Manufacturer="ST Microelectronics", Manufacturer P/N=STM32L011G4U6, PackageCNTX=QFN-28, Supplier Part Number 1=497-18803-1-ND, VoltageMax=3,6, VoltageMin=1,65, ADCbits=12, ADCchannels=10, ComponentLink1Description="Manufacturer Datasheet", ComponentLink1URL=https://www.st.com/resource/en/datasheet/stm32l011g4.pdf, Contronix P/N=U8HUKC, Core=Cortex-M0+, Created="19.11.2020 18:45:38", Design Item Id=IC-STM32L011G4U6-QFN28, EEPROM=512, Flash=16, GPIOs=24, I2C=1, Manufacturer Part Number=STM32L011G4U6, Modified="19.11.2020 18:48:52", MountingType=SMT, NumberOfPins=28, NumberOfRows=4, Obsolete=0, PackageManufacturer=QFN-28, Price=1,9, Price (€)=1,9, RAM=2, Rev="Not in version control", RTC=1, SPI=1, Supplier 1=Digi-Key, Supplier 2=Farnell, Supplier Part Number 2=3365502, USART=1

## Via types
v1: diameter 0.4, hole 0.2, Top Layer to Bottom Layer, tented both sides, 139 vias
v2: diameter 0.6, hole 0.3, Top Layer to Bottom Layer, tented both sides, 4 vias
v3: diameter 0.5, hole 0.2, Top Layer to Bottom Layer, tented both sides, 1 vias

## Nets (pads, with @x,y where several pads share a name; then routed paths per layer and width w, separated by ;. In a path a pad name is that pad's centre, name@x,y a point inside that pad or via, vN(x,y) a via of type N, cw(c..) or ccw(c..) an arc to the next point about the centre after c; other vN are vias at no path point)
GND: C1.1 C2.1 C3.1 C4.1 C5.1 C6.1 C7.1 C8.1 C9.1 J5.2 J6.2 J7.4 J8.3 J9.3 JP4.1 N1.2 N1.3 Q1.2 R12.1 R14.1 R16.1 S1.2 S2.2 U1.1 U2.16
  other v1: 18.347,1.212 16.62,1.266 20.887,1.332 15.227,1.911 22.695,2.048 5.168,2.389 7.375,2.739 10.375,2.739 13.375,2.739 25.375,2.739 28.375,2.739 23.473,3.186 13.335,4.247 24.075,4.554 2.875,5.739 5.875,5.739 8.875,5.739 29.875,5.739 7.375,8.739 13.375,8.739 24.095,9.249 5.288,9.617 14.17,10.555 23.223,10.64 21.842,11.68 5.875,11.739 8.875,11.739 11.875,11.739 14.875,11.739 23.875,11.739 16.318,12.175 20.103,12.294 18.074,12.464 4.375,14.739 13.375,14.739 11.875,17.739 14.875,17.739 29.875,17.739 7.879,18.244 6.481,18.295 10.994,18.332 12.02,18.332 13.106,18.332 1.23,18.483 8.629,18.977 10.514,19.351 13.745,19.435 7.964,19.864 6.379,19.898 1.375,20.739 8.202,22.511 7.855,22.935 2.875,23.739 7.855,23.752 20.875,23.739 23.875,23.739 26.875,23.739 29.875,23.739 12.414,25.541 11.681,25.592 13.164,25.814 1.375,26.739 10.375,26.739 13.375,26.739 16.375,26.739 3.784,26.944 3.933,27.816 14.272,28.132 4.378,29.55 20.875,29.739 23.875,29.739 26.875,29.739 29.875,29.739 4.132,30.434 15.585,30.468 16.352,30.758 4.926,31.032 15.5,31.047 8.253,31.331 16.387,31.388 7.055,31.602 4.092,31.678 8.218,31.909 1.375,32.739 4.375,32.739 6.54,32.733 7.375,32.739 25.375,32.739 5.649,32.884 7.115,33.263 12.09,33.707 13.983,33.69 6.26,34.045 13.045,34.713 7.104,34.923 2.875,35.739 5.875,35.739 29.875,35.739 21.211,37.816 22.746,37.816 14.528,38.072 4.282,38.259 5.271,38.464 1.375,38.739 10.375,38.739 21.228,39.435 13.284,39.674 2.696,40.203 4.146,41.243 2.875,41.739 5.875,41.739 8.875,41.739 11.875,41.739 14.875,41.739 17.875,41.739 20.875,41.739 23.875,41.739 26.875,41.739 29.875,41.739
LED_CATHODE.CATH_B: R3.2 R6.2 R9.2 U2.8 | length 24.1
  Top Layer w0.2: U2.8 11.133,32.661 11.183,32.711 11.283,32.711 11.361,32.789 v1(12.208,32.789) ; R6.2 18.084,19.077 19.047,20.04 19.047,26.057 18.084,27.02 R9.2 18.084,27.22 18.827,27.963 18.827,29.536 18.338,30.024 18.023,30.024 17.762,30.285 17.762,31.878 18.084,32.2 R3.2
  Bottom Layer w0.2: v1@12.209,32.788 12.572,32.788 15.825,29.536 17.926,29.536 v1(18.377,29.986)
LED_CATHODE.CATH_G: R2.2 R5.2 R8.2 U2.11 | length 25.3
  Top Layer w0.2: v1@10.659,31.584 v1(10.697,31.546) 10.163,31.546 9.683,32.026 U2.11@9.683,32.311 ; R5.2 18.084,20.603 18.721,21.24 18.721,24.203 18.722,24.205 18.722,25.719 18.036,26.405 17.749,26.405 17.534,26.62 17.534,27.619 17.571,27.656 17.571,27.924 v1(17.609,27.963) 17.609,28.017 17.859,28.267 17.859,28.82 18.084,29.045 17.462,29.667 17.462,30.125 17.437,30.15 17.437,32.989 18.084,33.636 R2.2 ; U2.11@9.683,32.311 9.683,32.461 U2.11 9.633,32.361 U2.11@9.683,32.311
  Bottom Layer w0.2: v1(10.697,31.546) 12.896,31.546 15.622,28.82 16.752,28.82 v1(17.609,27.963)
LED_CATHODE.CATH_R: R1.2 R4.2 R7.2 U2.7 | length 20.8
  Top Layer w0.2: U2.7 11.708,32.086 v1(12.14,32.086) ; R4.2 R7.2 18.084,25.395 17.159,26.32 17.159,28.445 17.162,28.447 v1(17.162,29.045) 17.137,29.07 17.137,29.991 17.112,30.016 17.112,34.19 18.084,35.163 R1.2
  Bottom Layer w0.2: v1(12.14,32.086) 12.815,32.086 15.756,29.145 16.886,29.145 16.948,29.083 17.123,29.083 v1(17.162,29.045)
MIC.CLK: N1.4 U2.24 | length 9.9
  Top Layer w0.2: N1.4 1.747,30.211 2.346,29.611 2.346,29.139 2.895,28.59 5.848,28.59 7.075,27.363 7.676,27.363 7.727,27.413 8.079,27.413 8.082,27.41 8.699,27.41 9.133,27.843 U2.24
MIC.DATA: N1.1 U2.25 | length 8.9
  Top Layer w0.2: N1.1 3.422,29.389 3.895,28.915 5.982,28.915 7.11,27.788 v1(7.526,27.788) ; v1(7.861,26.914) 7.899,26.952 8.047,26.952 8.175,27.081 8.411,27.081 8.504,26.988 8.861,26.988 9.633,27.76 U2.25
  Bottom Layer w0.2: v1(7.526,27.788) 7.53,27.784 7.53,27.433 7.823,27.14 7.823,26.952 v1(7.861,26.914)
NetC2_2: C2.2 C3.2 JP3.1 R10.1 R15.2 U1.3 | length 8.3
  Top Layer w0.5: U1.3 12.677,20.511 C3.2 12.779,20.583 12.779,21.511 R15.2 15.868,21.586 JP3.1 R10.1
NetC8_2: C8.2 U2.4 | length 2.2
  Top Layer w0.2: U2.4 12.208,30.536 12.591,30.153 C8.2@12.591,29.089
NetD1_1: D1.1 J1.2 | length 3.2
  Top Layer w0.5: D1.1 23.315,34.399 23.465,34.249 25.7,34.249 25.852,34.097 26.134,34.097 J1.2@26.286,34.249
NetD1_2: D1.2 R3.1 | length 4.4
  Top Layer w0.3: R3.1 19.634,32.223 19.809,32.048 22.673,32.048 23.065,32.44 23.065,32.736 D1.2
NetD1_3: D1.3 R2.1 | length 2.9
  Top Layer w0.3: R2.1 19.634,33.655 19.809,33.48 21.821,33.48 D1.3@22.215,33.086
NetD1_4: D1.4 R1.1 | length 3
  Top Layer w0.3: R1.1 19.634,35.17 19.809,34.995 21.706,34.995 21.865,34.836 21.965,34.836 22.215,34.586 D1.4
NetD2_1: D2.1 J2.1 | length 3.4
  Top Layer w0.5: D2.1 25.522,21.403 J2.1
NetD2_2: D2.2 R4.1 | length 2.8
  Top Layer w0.3: R4.1 21.53,22.037 21.865,21.703 21.915,21.703 22.165,21.453 D2.2
NetD2_3: D2.3 R5.1 | length 2.9
  Top Layer w0.3: R5.1 21.265,20.503 21.865,19.903 21.915,19.903 22.165,19.653 D2.3
NetD2_4: D2.4 R6.1 | length 4.3
  Top Layer w0.3: R6.1 19.634,18.905 19.809,18.73 22.491,18.73 23.065,19.303 23.115,19.303 23.365,19.553 D2.4
NetD3_1: D3.1 R9.1 | length 4.6
  Top Layer w0.3: R9.1 22.123,27.12 22.84,27.836 22.84,27.844 23.015,28.02 23.115,28.02 23.515,28.42 D3.1
  Top Layer w0.5: R9.1@19.709,27.131 R9.1@19.727,27.131
NetD3_2: D3.2 J3.1 | length 3.1
  Top Layer w0.5: D3.2 23.515,25.82 23.815,26.12 24.015,26.12 24.398,26.503 J3.1@26.134,26.503
NetD3_3: D3.3 R7.1 | length 2.5
  Top Layer w0.3: R7.1 19.634,25.389 19.809,25.564 D3.3@21.932,25.564
NetD3_4: D3.4 R8.1 | length 2.5
  Top Layer w0.3: R8.1 21.69,28.945 D3.4
NetJ4_2: J4.2 J5.1 J6.1 | length 29.9
  Top Layer w0.8: J4.2 10.615,7.198 v2(11.032,6.781) ; J6.1@27.718,7.129 27.718,8.017 27.922,8.221 J5.1
  Bottom Layer w0.8: v2(11.032,6.781) v2(26.532,6.781)
NetJ8_2: J8.2 U2.14 | length 25.7
  Top Layer w0.2: U2.14 8.133,40.591 8.442,40.9 23.729,40.9 J8.2
NetL1_2: L1.2 R15.1 U1.4 U1.6 | length 6.1
  Top Layer w0.5: U1.6 8.848,21.655 8.917,21.586 ; 9.998,21.586 10.148,21.736 U1.4
  Top Layer w0.75: L1.2 8.917,21.586 9.998,21.586 R15.1
NetQ1_3: Q1.3 U2.6 | length 1.8
  Top Layer w0.2: U2.6 12.444,31.536 13.081,32.172 Q1.3
NetR13_1: R13.1 R14.2 U2.12 | length 2.5
  Top Layer w0.2: R14.2 8.691,33.961 8.916,33.736 9.016,33.736 9.133,33.618 ; U2.12 9.133,33.618 ; R13.1@9.633,34.062 9.533,34.062 9.308,33.837 9.308,33.793 9.133,33.618
NetR16_2: R16.2 U2.1 | length 1.5
  Top Layer w0.2: U2.1 11.758,29.036 11.808,28.986 11.808,28.886 12.029,28.665 R16.2@12.029,27.776
NetS1_1: S1.1@1.051,9.662 U2.13 | length 27.1
  Top Layer w0.2: S1.1@1.051,9.662 1.051,9.743 1.934,10.626 3.402,10.626 3.463,10.687 3.525,10.687 3.625,10.787 v1(3.679,10.787) ; U2.13 8.64,32.504 8.64,32.088 8.643,32.085 8.643,31.692 v1(8.678,31.656)
  Bottom Layer w0.2: v1(3.679,10.787) 3.718,10.825 3.884,10.825 5.636,12.577 5.636,15.825 7.058,17.247 7.058,27.921 7.428,28.291 7.428,28.452 7.54,28.564 7.54,29.393 7.613,29.467 7.613,29.784 8.678,30.85 v1(8.678,31.656)
NetS2_1: S2.1@2.608,17.327 U2.18 | length 15.8
  Top Layer w0.2: v1(2.6,18.6) 2.608,18.592 S2.1@2.608,17.327 ; v1(7.058,30.461) 7.133,30.536 U2.18
  Bottom Layer w0.2: v1(2.6,18.6) 6.731,22.731 6.731,28.215 7.215,28.699 7.215,29.528 7.288,29.601 7.288,30.231 v1(7.058,30.461)
PWM_FET.PWM_N-FET: JP2.1 R12.2 U1.2 U2.20 | length 14.7
  Top Layer w0.2: U2.20 8.438,29.536 8.61,29.364 8.629,29.364 8.729,29.264 v1(8.783,29.264) ; JP2.1 R12.2 v1(9.494,19.765) U1.2@9.494,20.516
  Bottom Layer w0.2: v1(8.783,29.264) 8.757,29.238 8.757,27.467 8.286,26.996 8.286,23.296 9.494,22.088 v1(9.494,19.765)
PWM_FET.PWM_P-FET: JP1.1 R11.1 U1.5 U2.19 | length 11.4
  Top Layer w0.2: R11.1 8.827,25.399 9.227,25.799 JP1.1 ; U2.19 7.676,30.018 8.685,30.018 8.726,29.977 9.291,29.977 9.558,29.709 9.558,29.483 v1(9.597,29.445) ; v1(9.493,23.464) 9.495,23.462 U1.5@9.495,22.657
  Bottom Layer w0.2: v1(9.493,23.464) JP1.1 9.597,25.902 v1(9.597,29.445)
RX: J9.1 U2.9 | length 13.9
  Top Layer w0.2: U2.9 10.633,33.085 v1(10.659,33.111)
  Bottom Layer w0.2: v1(10.659,33.111) 10.659,35.924 11.69,36.956 14.999,36.956 16.526,38.483 18.548,38.483 J9.1
SWCLK: J7.3 U2.22 | length 14.1
  Top Layer w0.2: v1(8.133,27.835) U2.22
  Bottom Layer w0.2: J7.3 8.347,37.994 8.347,32.67 9.085,31.931 9.085,31.851 9.103,31.832 9.103,31.48 9.003,31.38 9.003,30.715 7.938,29.65 7.938,29.332 7.865,29.259 7.865,28.11 8.133,27.842 v1(8.133,27.835)
SWDIO: J7.2 U2.21 | length 12.3
  Top Layer w0.2: U2.21 7.632,29.059 8.267,29.059 v1(8.29,29.083)
  Bottom Layer w0.2: v1(8.29,29.083) 8.296,29.088 8.296,29.548 9.328,30.58 9.328,30.886 9.428,30.986 9.428,31.967 9.41,31.985 9.41,32.066 8.672,32.804 8.672,38.816 9.223,39.367 J7.2
TX: J9.2 U2.10 | length 11.8
  Top Layer w0.2: U2.10 v1(10.133,33.111)
  Bottom Layer w0.2: v1(10.133,33.111) 10.133,33.165 10.234,33.265 10.234,33.287 10.334,33.387 10.334,36.059 11.556,37.281 14.806,37.281 J9.2
V_BAT: C1.2 C4.2 C5.2 C6.2 C7.2 C9.2 J4.1 J7.1 J8.1 L1.1 N1.5 Q1.1 Q1.4 R11.2 U2.5 U2.17 | length 71.1
  Top Layer w0.3: N1.5 1.645,27.994 C9.2@1.804,27.834 ; C9.2 C9.2@1.804,27.834 ; 5.551,24.277 5.658,24.384 10.272,24.384 11.075,25.187 11.075,26.345 11.77,27.041 12.896,27.041 13.544,27.689 13.544,30.381 C7.2@13.564,30.4 ; v2(5.551,26.349) 3.315,26.349 2.054,27.609 2.029,27.609 C9.2@1.804,27.834 ; 6.275,31.05 6.289,31.036 U2.17 ; U2.5 12.931,31.036 13.406,30.561 C7.2
  Top Layer w0.5: J7.1 12.983,38.438 12.983,36.235 14.748,34.47 14.748,33.922 14.998,33.672 Q1.1 ; C7.2@13.406,30.561 13.531,30.686 13.544,30.686 14.731,31.872 14.731,31.922 14.981,32.172 Q1.4 Q1.1 ; C4.2 16.343,33.635 15.068,33.635 Q1.1
  Top Layer w0.75: v2(6.275,29.439) 6.275,31.05 C6.2
  Top Layer w0.8: v2(5.551,26.349) 5.551,24.277 5.551,22.205 5.527,22.181 5.527,21.636 L1.1 C1.2 5.477,16.605 J4.1
  Bottom Layer w0.2: J7.1 13.352,41.247 25.922,41.247 J8.1
  Bottom Layer w0.75: v2(5.551,26.349) 5.551,28.648 6.275,29.372 v2(6.275,29.439)
V_BOOST: J1.1 J2.2 J3.2 R10.2 R13.2 | length 49
  Top Layer w0.3: R13.2@9.633,35.612 11.926,35.612 v3(11.938,35.6)
  Top Layer w0.5: R10.2 17.262,17.463 27.414,17.463 28.962,19.011 J2.2 28.932,20.533 28.932,27.09 J3.2 J1.1@28.902,33.676
  Bottom Layer w0.3: v3(11.938,35.6) 11.95,35.612 27.086,35.612 J1.1
pads on no net: FID1.NC FID2.NC FID3.NC FID4.NC S1.1@1.051,2.462 S2.1@2.608,12.127 U2.2 U2.3 U2.15 U2.23 U2.26 U2.27 U2.28

## Polygon pours and split planes (outlines as drawn)
GND on Top Layer "GND-Top" (solid, pour order 10): 0,2 0,42.1 cw(c2,42.1) 2,44.1 30.2,44.1 cw(c30.2,42.1) 32.2,42.1 32.2,2 cw(c30.2,2) 30.2,0 2,0 cw(c2,2)
GND on Bottom Layer "GND-Bot" (solid, pour order 11): 0,2 0,42.1 cw(c2,42.1) 2,44.1 30.2,44.1 cw(c30.2,42.1) 32.2,42.1 32.2,2 cw(c30.2,2) 30.2,0 2,0 cw(c2,2)

## Silkscreen, mask and mechanical layers (free items; w line width, h text height)
Top Solder:
  drawing of 10 lines, arcs and shapes, not listed
  text "RX" at 17.402,36.76 h1.52 r90
  text "V+" at 12.082,36.692 h1.52 r90
  text "TX" at 19.942,36.706 h1.52 r90
  text "SIG" at 25.635,36.063 h1.52 r90
  text "CLK" at 6.868,36.029 h1.52 r90
  text "GND" at 4.53,36.01 h1.52 r90
  text "DIO" at 9.39,36.025 h1.52 r90
  text "GND" at 14.958,36.01 h1.52 r90
  text "GND" at 22.946,36.01 h1.52 r90
  text "VBAT" at 27.883,35.264 h1.52 r90
  text "IBAT" at 8.027,15.562 h1.52
  text "VBAT" at 25.221,15.562 h1.52
  text "GND" at 7.618,3.009 h1.52
Board Outline:
  lines w0.1: 0,12.827 0,2 ccw(c2,2) 2,0 30.2,0 ccw(c30.2,2) 32.2,2 32.2,42.1 ccw(c30.2,42.1) 30.2,44.1 2,44.1 ccw(c2,42.1) 0,42.1 0,16.627